# Altium PCB QCopterRCs_Pcb.PcbDoc
Units mil, origin at the board's own origin, x right, y up, seen from the top; angles counter-clockwise.
Board outline 5539.33 x 3011.35 mil, 2 copper layers (Top Layer, Bottom Layer), stack 62.205 mil thick; 50 components, 51 nets, 248 pads, 81 vias.
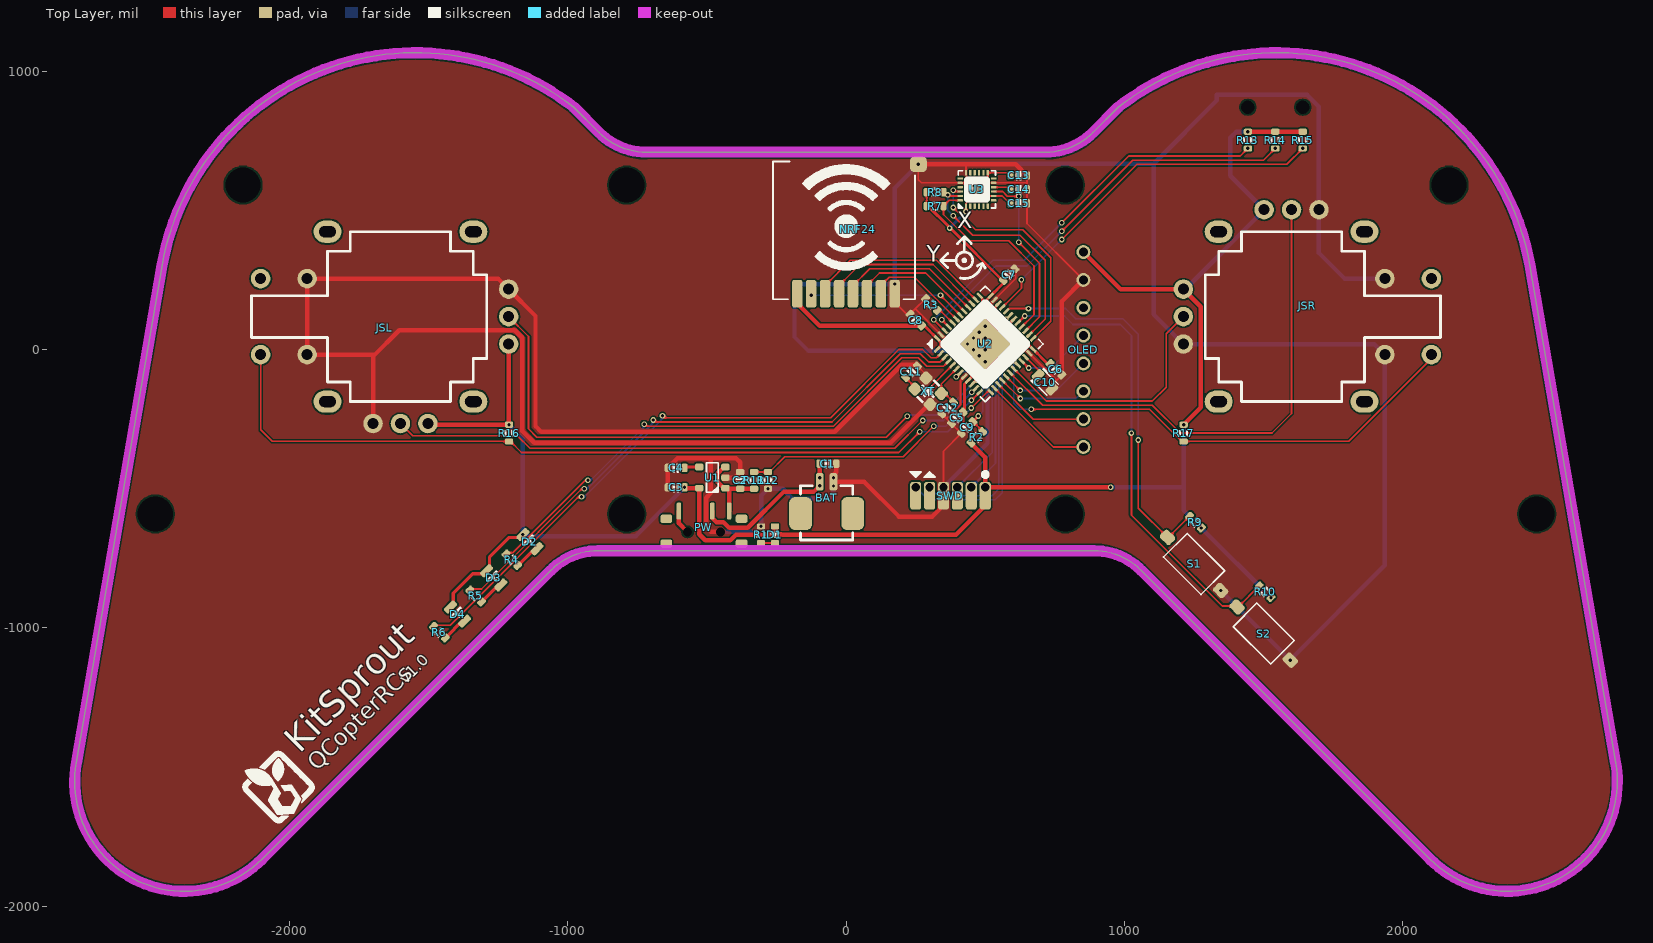
[diagram p0: Top Layer view]
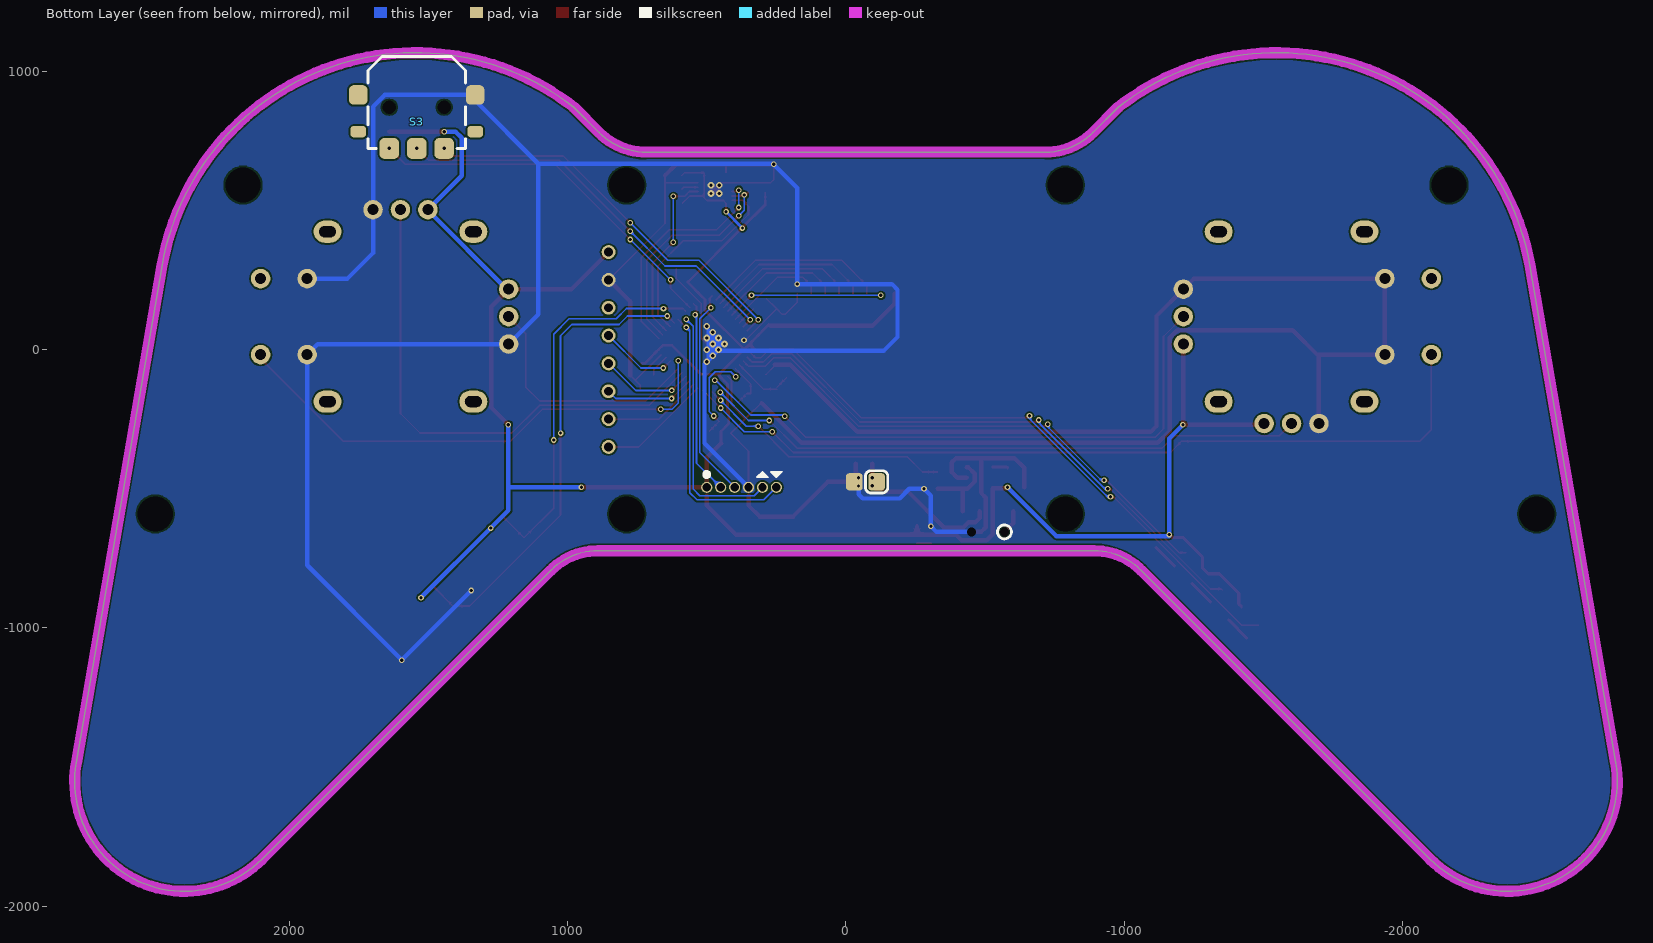
[diagram p1: Bottom Layer view, seen from below]
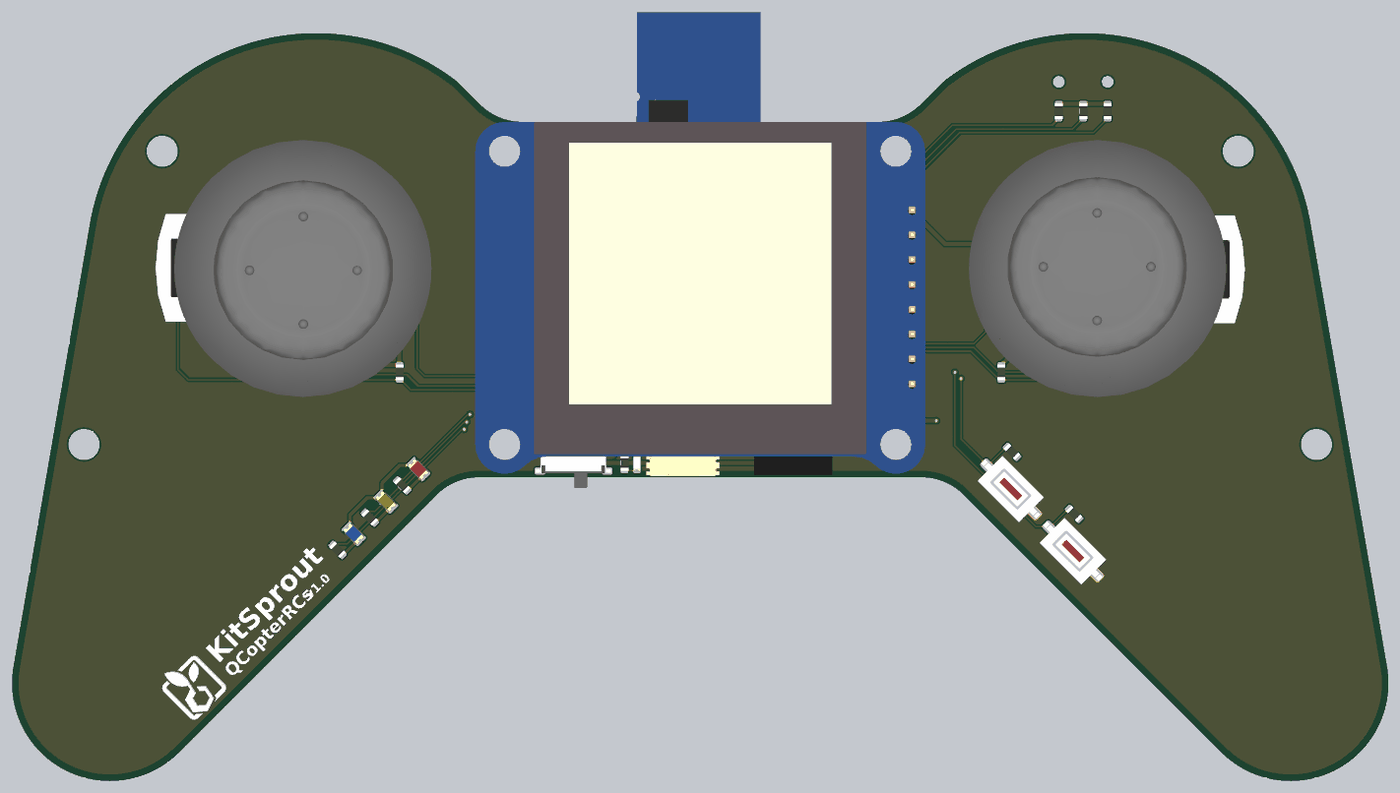
[diagram p2: 3D render of the assembled board from above, using the file's embedded part models]

## Layer stack, top to bottom
Top Solder: solder mask 0.3937, Solder Resist, Dk 3.5
Top Layer: signal copper 1.5748
Dielectric 1: core 59.0551, Dk 4.2
Bottom Layer: signal copper 1.5748
Bottom Solder: solder mask 0.3937, Solder Resist, Dk 3.5

## Board outline
-2763.7,-1483.52 ccw(c-2375.98,-1551.89) -2097.6,-1830.28 -1060.47,-793.15 cw(c-889.76,-963.86) -889.76,-722.44 889.76,-722.44 cw(c889.76,-963.86) 1060.47,-793.15 2097.6,-1830.28 ccw(c2375.98,-1551.89) 2763.7,-1483.52 2455.65,302.73 ccw(c1546.18,142.37) 977.62,870.1 886.89,779.37 cw(c716.18,950.08) 716.18,708.66 -716.18,708.66 cw(c-716.18,950.08) -886.89,779.37 -977.62,870.1 ccw(c-1546.18,142.37) -2455.65,302.73

## Design rules (kind name [scope] priority, off if disabled: settings)
BoardOutlineClearance [All] p1: gap=10 ignorepadtopadclearanceinfootprint=FALSE except(0: Arc-SplitContinuation Track-SplitContinuation SMDPad-SplitContinuation THPad-SplitContinuation Via-SplitContinuation Fill-SplitContinuation Poly-SplitContinuation Region-SplitContinuation Text-SplitContinuation)
Clearance ClearancePolygon [InPolygon] p1: gap=6 ignorepadtopadclearanceinfootprint=FALSE except(0: Arc-Hole Track-Hole SMDPad-Hole THPad-Hole Via-Hole Fill-Hole Poly-Hole Region-Hole Text-Hole)
Clearance [All] p2: gap=6 ignorepadtopadclearanceinfootprint=FALSE except(0: Arc-Hole Track-Hole SMDPad-Hole THPad-Hole Via-Hole Fill-Hole Poly-Hole Region-Hole Text-Hole)
ComponentClearance [All] p1: gap=0 collisioncheckmode=3 verticalgap=0 showdistances=FALSE
Height [All] p1: minheight=0 maxheight=5000 prefheight=500
HoleSize [All] p1: absolutevalues=TRUE maxlimit=200 minlimit=1 maxpercent=80.000 minpercent=20.000
HoleToHoleClearance [All] p1: gap=0 allowstackedmicrovias=TRUE
MinimumAnnularRing [All] p1: minimumring=4
MinimumSolderMaskSliver [All] p1: minsoldermaskwidth=0
PolygonConnect [All] p1: connectstyle=Direct reliefconductorwidth=10 reliefentries=4 polygonreliefangle="90 Angle" airgapwidth=10
RoutingVias [All] p1: holewidth=12 width=24 viastyle="Through Hole" minholewidth=12 minwidth=20 maxholewidth=28 maxwidth=50
SMDEntry [All] p1: side=TRUE corner=TRUE anyangle=TRUE
SilkToSilkClearance [All] p1: silktosilkclearance=0
SilkToSolderMaskClearance [IsPad] p1: minsilkscreentomaskgap=0 clearancetoexposedcopper=TRUE
SolderMaskExpansion [All] p1: expansion=2
Width [All] p1: maxlimit=100 minlimit=6 preferedwidth=10
23 further rules are at their usual default settings.

## Components (designator, comment, footprint, x,y, rotation, side; value= is the part's Value field where it differs from the comment)
BAT "MX1.25_2P" MX1.25_S90_2P -69.61,-589 r0 top
C1 "Cap_0603" CAP_0603 -65,-410 r180 top value=1u
C2 "Cap_0603" CAP_0603 -380,-470 r270 top value=0.1u
C3 "Cap_0603" CAP_0603 -610,-495 r0 top value=0.1u
C4 "Cap_0603" CAP_0603 -610,-425 r0 top value=22n
C5 "Cap_0603" CAP_0603 400,-245 r45 top value=0.1u
C6 "Cap_0603" CAP_0603 753.94,-70.82 r135 top value=0.1u
C7 "Cap_0603" CAP_0603 585.82,268.94 r225 top value=0.1u
C8 "Cap_0603" CAP_0603 251.06,105.82 r315 top value=0.1u
C9 "Cap_0603" CAP_0603 435,-280 r45 top value=0.1u
C10 "Cap_Tan_0805" CAP_TAN_P0805 714.63,-117.2 r315 top value=2.2u
C11 "Cap_0603" CAP_0603 235,-80 r225 top value=10p
C12 "Cap_0603" CAP_0603 365,-210 r45 top value=10p
C13 "Cap_0603" CAP_0603 620,625 r0 top value=10n
C14 "Cap_0603" CAP_0603 620,575 r0 top value=0.1u
C15 "Cap_0603" CAP_0603 620,525 r180 top value=0.1u
D1 "LED_0603" LED_0603_YELLOW -255,-665 r270 top
D2 "LED_0805" LED_0805_RED -1135,-690 r315 top
D3 "LED_0805" LED_0805_GREEN -1265,-820 r315 top
D4 "LED_0805" LED_0805_BLUE -1395,-950 r315 top
JSL "JoyStick" JoyStick -1600,118.11 r0 top locked
JSR "JoyStick" JoyStick 1600,118.11 r180 top locked
NRF24 "nRF24L01P_PA_LNA" NRF24L01P_PA_LNA 175,200 r90 top locked
OLED "OLED_1.5_128*128" OLED_1.5_128x128 0,0 r0 top
PW "SwitchSPDT_2.8x6.6_90" SwitchSPDT_2.8X6.6_90 -510,-655 r0 top locked
R1 "Res_0603" RES_0603 -305,-665 r270 top value=1K
R2 "Res_0603" RES_0603 470,-315 r225 top value=10K
R3 "Res_0603" RES_0603 306.74,161.5 r135 top value=10K
R4 "Res_0603" RES_0603 -1200,-755 r315 top value=680R
R5 "Res_0603" RES_0603 -1330,-885 r315 top value=680R
R6 "Res_0603" RES_0603 -1460,-1015 r315 top value=680R
R7 "Res_0603" RES_0603 320,515 r180 top value=4.7K
R8 "Res_0603" RES_0603 320,565 r180 top value=4.7K
R9 "Res_0603" RES_0603 1255,-620 r315 top value=10K
R10 "Res_0603" RES_0603 1505,-870 r315 top value=10K
R11 "Res_0603" RES_0603 -330,-470 r270 top value=4.7K
R12 "Res_0603" RES_0603 -280,-470 r90 top value=4.7K
R13 "Res_0603" RES_0603 1443.15,752.13 r90 top value=10K
R14 "Res_0603" RES_0603 1541.57,752.13 r90 top value=10K
R15 "Res_0603" RES_0603 1640,752.13 r90 top value=10K
R16 "Res_0603" RES_0603 -1210,-300 r90 top value=10K
R17 "Res_0603" RES_0603 1212.28,-300 r90 top value=10K
S1 "ButtonTACT_3x6x2.5_180" ButtonTACT_3x6x2.5_180 1250,-770 r135 top locked
S2 "ButtonTACT_3x6x2.5_180" ButtonTACT_3x6x2.5_180 1500,-1020 r135 top locked
S3 "ButtonPushLever_11*12_90" ButtonPushLever_11*12_90 1541.57,862.13 r180 bottom locked
SWD "HDR1x6_1.27" HDR1X6_1.27_180HF 500,-525 r270 top
U1 "RT9193" SOT23-5 -480,-460 r180 top
U2 "STM32F411C" QFN_P0.5_48 500,20 r45 top locked
U3 "MPU6500" QFN_P0.4_24 470,575 r90 top
XT "XTAL_2520_4P" XT_2520_4 295,-150 r135 top value=16MHz

## Footprints (in the part's own frame and the unit in brackets; to place one, negate y for a bottom-side part, rotate by r counter-clockwise, add the part's x,y. Pads: shape width x height; smd on the part's side, far side on the other; paste and mask are expansions set on the pad)
ButtonPushLever_11*12_90 [mil]
  rrect50% 55x40 smd: 0(-210,-80) 0(210,-80)
  round 0 hole 48 unplated mask+0: 0(-98.43,7.87)
  round 40 hole 48 unplated mask+0: 0(98.43,7.87)
  rrect50% 70x75 smd: 1(-98.43,-140) 2(0,-140) 3(98.43,-140)
  rrect50% 66x70 smd: 4(210,52) 5(-210,52)
  silkscreen extent -175,-140 175,190
ButtonTACT_3x6x2.5_180 [mil]
  rrect50% 50x40 smd: 1(-135,0) 2(135,0)
  silkscreen extent -95,-60 95,60, body extent -157,-71 157,71, height 94
CAP_0603 [mil]
  rrect50% 22x30 smd: 1(-30,0) 2(30,0)
  silkscreen extent -10,-15 10,15, body extent -31,-16 31,16, height 31
CAP_TAN_P0805 [mil]
  rrect50% 30x44 smd: 1(-35,0) 2(35,0)
  silkscreen extent -40,-34 40,34, body extent -40,-27 40,27, height 59
HDR1X6_1.27_180HF [mil]
  rrect50% 100x40 smd: 1(0,0) 2(0,-50) 3(0,-100) 4(0,-150) 5(0,-200) 6(0,-250)
  body extent -38,-283 190,33, height 71
JoyStick [mil]
  oval 100x80 hole 40 slot 60 at 0 deg: 0(-261.81,-305.12) 0(-261.81,305.12) 0(261.81,-305.12) 0(261.81,305.12)
  round 70 hole 39.37: 1(-98.43,-383.86) 2(0,-383.86) 3(98.43,-383.86) 4(388.86,-98.43) 5(388.86,0) 6(388.86,98.43) 7(-501.97,136.57) 8(-334.8,136.57) 9(-501.97,-136.57) 10(-334.8,-136.57)
  silkscreen extent -535,-305 310,305, body extent -592,-518 518,518, height 1126
LED_0603_YELLOW [mil]
  rrect50% 22x30 smd: 1(-30,0) 2(30,0)
  silkscreen extent -10,-16 10,16, body extent -32,-16 32,16, height 24
LED_0805_BLUE [mil]
  rrect50% 24x50 smd: 1(-36,0) 2(36,0)
  silkscreen extent -11,-24 12,24, body extent -40,-25 40,25, height 43
LED_0805_GREEN [mil]
  rrect50% 24x50 smd: 1(-36,0) 2(36,0)
  silkscreen extent -11,-24 12,24, body extent -40,-25 40,25, height 43
LED_0805_RED [mil]
  rrect50% 24x50 smd: 1(-36,0) 2(36,0)
  silkscreen extent -11,-24 12,24, body extent -40,-25 40,25, height 43
MX1.25_S90_2P [mil]
  rrect50% 82x118 smd: 0(-93.58,0) 0(93.58,0)
  rrect50% 28x62 smd: 1(-24.61,114) 2(24.61,114)
  silkscreen extent -94,-95 94,100, body extent -147,-129 147,135, height 98
NRF24L01P_PA_LNA [mil]
  rrect50% 100x38 smd: 1(0,350) 2(0,300) 3(0,250) 4(0,200) 5(0,150) 6(0,100) 7(0,50) 8(0,0)
  rrect50% 55x60 smd: 8(465,-85)
  silkscreen extent -20,-73 475,437, body extent -15,-68 950,432, height 46
OLED_1.5_128x128 [mil]
  round 50 hole 32: 1(852.4,350) 2(852.4,250) 3(852.4,150) 4(852.4,50) 5(852.4,-50) 6(852.4,-150) 7(852.4,-250) 8(852.4,-350)
  body extent -906,-709 906,709, height 335
QFN_P0.4_24 [mil]
  rrect50% 20x8 smd: 1(-60,39.37) 2(-60,23.62) 3(-60,7.87) 4(-60,-7.87) 5(-60,-23.62) 6(-60,-39.37) 13(60,-39.37) 14(60,-23.62) 15(60,-7.87) 16(60,7.87) 17(60,23.62) 18(60,39.37)
  rrect50% 8x20 smd: 7(-39.37,-60) 8(-23.62,-60) 9(-7.87,-60) 10(7.87,-60) 11(23.62,-60) 12(39.37,-60) 19(39.37,60) 20(23.62,60) 21(7.87,60) 22(-7.87,60) 23(-23.62,60) 24(-39.37,60)
  rrect20% 32x32 smd: 25(0,0)
  silkscreen extent -67,-67 67,67, body extent -60,-60 60,60, height 39
QFN_P0.5_48 [mil]
  rrect50% 28x10 smd: 1(-136,108.27) 2(-136,88.58) 3(-136,68.9) 4(-136,49.21) 5(-136,29.53) 6(-136,9.84) 7(-136,-9.84) 8(-136,-29.53) 9(-136,-49.21) 10(-136,-68.9) 11(-136,-88.58) 12(-136,-108.27) 25(136,-108.27) 26(136,-88.58) 27(136,-68.9) 28(136,-49.21) 29(136,-29.53) 30(136,-9.84) 31(136,9.84) 32(136,29.53) 33(136,49.21) 34(136,68.9) 35(136,88.58) 36(136,108.27)
  rrect50% 10x28 smd: 13(-108.27,-136) 14(-88.58,-136) 15(-68.9,-136) 16(-49.21,-136) 17(-29.53,-136) 18(-9.84,-136) 19(9.84,-136) 20(29.53,-136) 21(49.21,-136) 22(68.9,-136) 23(88.58,-136) 24(108.27,-136) 37(108.27,136) 38(88.58,136) 39(68.9,136) 40(49.21,136) 41(29.53,136) 42(9.84,136) 43(-9.84,136) 44(-29.53,136) 45(-49.21,136) 46(-68.9,136) 47(-88.58,136) 48(-108.27,136)
  rrect10% 132x132 smd: 49(0,0)
  silkscreen extent -147,-147 147,147, body extent -139,-139 139,139, height 22
RES_0603 [mil]
  rrect50% 22x30 smd: 1(-30,0) 2(30,0)
  silkscreen extent -10,-16 10,15, body extent -31,-16 31,16, height 18
SOT23-5 [mil]
  rrect50% 30x24 smd: 1(-47,38) 2(-47,0) 3(-47,-38) 4(47,-38) 5(47,38)
  silkscreen extent -21,-53 21,53, body extent -55,-57 55,57, height 57
SwitchSPDT_2.8X6.6_90 [mil]
  rrect50% 42x30 smd: 0(-135,-42) 0(-135,47) 0(135,-42) 0(135,47)
  round 10 hole 32: 0(-59.06,0) 0(59.06,0)
  rrect50% 16x60 smd: 1(90,75) 2(30,75) 3(-90,75)
  body extent -152,-111 151,86, height 55
XT_2520_4 [mil]
  rrect50% 40x40 smd: 1(39,28) 2(-39,28) 3(-39,-28) 4(39,-28)
  silkscreen extent -30,-45 30,45, body extent -49,-39 49,39, height 31

## Part data
BAT: "MX"
C1 C2 C3 C4 C5 C6 C7 C8 C9 C10 C11 C12 C13 C14 C15: "Capacitor"
D1 D2 D3 D4: "LED"
NRF24 OLED: "Module"
PW: "Switch"
R1 R2 R3 R4 R5 R6 R7 R8 R9 R10 R11 R12 R13 R14 R15 R16 R17: "Resistor"
S1 S2 S3: "Button"
SWD: "Header"
U1: "Power"
U2: library part STM32F4x1C, "MCU"
U3: library part MPU925x, "Sensor Motion"
XT: "Crystal Oscillator"

## Free pads (board coordinates)
  round 114.17 hole 126 unplated paste+0 mask+0: 0(-2480.32,-590.55) 0(-2165.35,590.55) 0(-787.4,-590.55) 0(-787.4,590.55) 0(787.4,-590.55) 0(787.4,590.55) 0(2165.35,590.55) 0(2480.32,-590.55)
  round 40 hole 30: 0(250,-495) 0(300,-495) 0(350,-495) 0(400,-495) 0(450,-495) 0(500,-495)
  rrect40% 60x62 smd far side: 2(-110,-475) 2(-30,-475)

## Via types
v1: diameter 20, hole 12, Top Layer to Bottom Layer, tented both sides, 67 vias
v2: diameter 24, hole 12, Top Layer to Bottom Layer, tented both sides, 14 vias

## Nets (pads, with @x,y where several pads share a name; then routed paths per layer and width w, separated by ;. In a path a pad name is that pad's centre, name@x,y a point inside that pad or via, vN(x,y) a via of type N, cw(c..) or ccw(c..) an arc to the next point about the centre after c; other vN are vias at no path point)
3V3: C3.2 C5.2 C6.2 C7.2 C8.2 C13.1 C15.2 D1.1 D2.1 D3.1 D4.1 JSL.3 JSL.4 JSR.3 JSR.4 NRF24.1 OLED.1 pad.0@500,-495 R2.2 R7.2 R8.2 R9.2 R10.2 R13.2 R14.2 R15.2 R16.2 R17.2 SWD.1 U1.5 U2.1 U2.9 U2.24 U2.36 U2.48 U3.1 U3.8 U3.13 | length 9646
  Top Layer w6: R7.2@290,520 R8.2 ; v1@430.63,499.37 U3.1 430.63,525.63 440,535 500,535 509.37,544.37 509.37,551.38 ; C15.2@587.52,525 561.15,551.38 U3.8 509.37,551.38 ; C13.1 580,635 U3.13 509.37,551.38
  Top Layer w10: C8.2@277.28,89.61 U2.48 346.89,20 ; R7.2@290,520 372.81,437.19 C7.2@565.94,244.06 ; U2.1 346.89,20 ; C5.2 421.21,-266.21 448.79,-293.79 R2.2 ; C5.2@425.32,-223.79 425.32,-124.28 U2.9 460.71,-88.88 ; C7.2@569.61,242.72 U2.36 506,179.11 506,141 366.44,1.44 365.44,1.44 ; C6.2 722.72,-49.61 U2.24 658.11,15 625,15 521.12,-88.88 460.71,-88.88 ; 346.89,20 365.44,1.44 ; 365.44,1.44 455.77,-88.88 460.71,-88.88
  Top Layer w12: D4.1 -1410,-914.09 -1410,-875 -1340,-805 -1300.91,-805 D3.1 -1280,-784.09 -1280,-745 -1210,-675 -1170.91,-675 v1(-1160.46,-664.54)
  Top Layer w16: JSL.3@-1500.43,-270 v1(-1210,-270) ; R16.2@-1211.14,-265.75 JSL.4 ; C3.2@-580,-498 U1.5 -527,-663 -505,-685 -415,-685 -395,-665 -255,-665 ; D1.1 -255,-665 ; NRF24.1 -175,165 -94.61,84.61 C8.2 ; R2.2 500,-387.43 500,-495 v1(950,-495) ; SWD.1 500,-560 395,-665 -255,-665 ; OLED.1 985.87,216.54 JSR.4 1274.19,153.49 1274.19,-208.09 v1(1212.28,-270) ; v1(1443.15,782.13) R15.2
  Bottom Layer w10: v1@372.81,437.19 v1(430.63,495)
  Bottom Layer w16: v1(-1210,-270) -1160.46,-319.54 v1(-1160.46,-664.54) ; v1@-1160.55,-670.55 -755.55,-670.55 v1(-580,-495) ; v1(950,-495) 1212.28,-495 ; JSR.4 1217.86,216.54 JSR.3@1502.44,501.11 ; v1(1212.28,-270) 1212.28,-495 ; v1(1443.15,782.13) 1402.13,782.13 1380,760 1380,623.54 JSR.3 ; v1@1525,-890 v1(1276.21,-641.21) 1212.28,-577.28 1212.28,-495
  other v1: 1526.21,-891.21 371.81,436.19
AD_BAT: R11.1 R12.2 U2.12 | length 922.3
  Top Layer w6: R11.1 R12.2 -275,-440 -220,-385 205,-385 v1@310,-280 ; v1(450.39,-182.72) U2.12
  Bottom Layer w6: v1(315,-275) 358.11,-275 v1(450.39,-182.72)
AD_JSL1: JSL.5 U2.10 | length 2160.7
  Top Layer w6: JSL.5 -1140,46.97 -1140,-285 -1110,-315 145,-315 v1(220,-240) ; U2.10 467.55,-109.88 v1(471.55,-109.88)
  Bottom Layer w6: v1@220,-235 342.44,-235 v1@467.55,-109.88
AD_JSL2: JSL.2 U2.11 | length 2171.8
  Top Layer w6: JSL.2 -1556,-309.75 -1180.25,-309.75 -1135,-355 175,-355 v1(275,-255)
  Bottom Layer w6: v1(275,-255) 350.27,-255 v1(451.47,-153.8)
AD_JSR1: JSR.5 U2.19 | length 894
  Top Layer w6: U2.19 718.92,-185 1100,-185 1150,-135 1150,56.97 JSR.5
AD_JSR2: JSR.2 U2.18 | length 1861.6
  Top Layer w6: U2.18 706.08,-200 1100,-200 1200,-300 1530,-300 1600,-230 JSR.2
BOOT: R3.1 U2.44 | length 70.7
  Top Layer w6: R3.1@332.95,145.29 U2.44
GND: BAT.2 C1.1 C2.1 C3.1 C4.1 C5.1 C6.1 C7.1 C8.1 C9.1 C10.2 C11.1 C12.1 C13.2 C14.2 C15.1 JSL.1 JSL.6 JSL.8 JSL.10 JSR.1 JSR.6 JSR.8 JSR.10 NRF24.8 OLED.2 pad.0@350,-495 pad.2@-30,-475 PW.0@-450.94,-655 R1.1 R3.2 R12.1 S1.1 S2.1 S3.4 SWD.4 U1.2 U2.8 U2.23 U2.35 U2.47 U2.49 U3.11 U3.18 U3.20 U3.25 XT.2 XT.4 | length 18618.1
  Top Layer w6: NRF24.8@175,200 175,170 217.96,127.04 C8.1 248.77,145.96 ; C11.1 XT.4@287.22,-89.8 ; v1(260,665) 260,610 271.38,598.62 U3.20 446.38,598.62 v2(455,590) ; R3.2 248.77,145.96 ; XT.2@309.95,-197.38 C12.1 361.29,-248.71 ; pad.0@350,-495 350,-365 C9.1 C5.1 361.29,-248.71 ; v1(366.2,33.53) 361.2,33.53 U2.47 248.77,145.96 ; U2.8 411.32,-110.44 411.32,-198.68 361.29,-248.71 ; U3.18 430.63,665 ; U2.49 520,40 520,165.27 U2.35 610,255.28 C7.1@610,290.15 ; U3.11 530,599 650,599 ; C13.2 650,599 ; U2.23@663.8,-18.53 756.23,-110.96 ; C10.2 739.38,-127.8 756.23,-110.96 ; C6.1 756.23,-110.96 ; OLED.2 650,452.4 C15.1 C14.2 650,599
  Top Layer w16: JSL.1 -1698.43,-25 ; C3.1 C4.1 -605,-390 -485,-390 ; PW.0@-450.94,-655 -485,-655 -502,-638 -502,-532 -485,-515 -485,-390 ; U1.2 -400,-460 C2.1 -380,-405 -395,-390 -485,-390 ; BAT.2 v1(-45,-460) -45,-450 -35,-440 C1.1 ; BAT.2@-35,-475 65,-475 190,-600 310,-600 350,-560 SWD.4 ; C11.1@256.21,-55 200,-55 -40,-295 -1095,-295 -1115,-275 -1115,120.39 JSL.6 -1249.29,254.68 JSL.8 JSL.10 -1698.43,-18.46 -1698.43,-25 ; v1(260,665) 430.63,665 610,665 C13.2 ; XT.2@302.78,-192.38 160.15,-335 -1120,-335 -1162.14,-292.86 -1162.14,42.14 -1189.11,69.11 -1604.32,69.11 -1698.43,-25 ; C6.1 775.15,172.75 OLED.2
  Bottom Layer w16: PW.0@-450.94,-655 -325,-655 v1(-305,-635) -305,-525 v1(-280,-500) -227.5,-500 -192.5,-535 -60,-535 -45,-520 v1(-45,-490) pad.2@-45,-475 ; pad.0@350,-495 508.05,-336.95 508.05,-51.68 v2(500,-43.64) v2(478.79,-22.43) 461.36,-5 -135,-5 -185,45 -185,215 -165,235 v1(175,235) 175,580 v1(260,665) 262.55,667.55 1105,667.55 ; v1(1345.46,-865.46) 1595,-1115 1934.8,-775.2 JSR.8 1896.65,19.68 JSR.6 1105,125.83 1105,667.55 ; JSR.10 1790.32,254.68 1698.43,346.57 JSR.1 1698.43,871.57 1655.87,914.13 S3.4 1331.57,894.13 1105,667.55
  other v1: 1595.46,-1115.46
  other v2: 457.57,-1.21 500,-1.21 436.36,20 478.79,20 457.57,41.21 500,41.21 478.79,62.43 500,83.64 455,560 485,560 485,590
KEY_JSL: JSL.9 R16.1 U2.13 | length 3011.5
  Top Layer w6: JSL.9 -2101.97,-288.03 -2060,-330 R16.1 -1205,-330 -1165,-370 190,-370 v1(265,-295) ; v1(450,-210) U2.13@513.44,-146.56
  Bottom Layer w6: v1(265,-295) 365,-295 v1(450,-210)
KEY_JSR: JSR.7 R17.1 U2.20 | length 1846.4
  Top Layer w6: v1(665,-215) 1090,-215 1205,-330 R17.1 1805,-330 2101.97,-33.03 JSR.7
  Bottom Layer w6: v1(602.05,-40.29) 602.05,-192.05 625,-215 v1(665,-215)
KEY_S1: R9.1 S1.2 U2.32 | length 1399.4
  Top Layer w6: U2.32 585.29,147.05 v1(655.29,147.05) ; v1(1050,-325) 1050,-570 S1.2 ; S1.2@1156.29,-676.29 R9.1
  Bottom Layer w6: v1(655.29,147.05) 787.95,147.05 825,110 995,110 1050,55 v1(1050,-325)
KEY_S2: R10.1 S2.2 U2.29 | length 1715.9
  Top Layer w6: U2.29 v1(642.05,120.29) ; v1(1025,-300) 1025,-595 1351.21,-921.21 S2.2@1403.79,-921.21 ; S2.2@1406.29,-926.29 R10.1
  Bottom Layer w6: v1(642.05,120.29) 784.71,120.29 815,90 985,90 1025,50 v1(1025,-300)
KEY_SL: R13.1 S3.3 U2.46 | length 1439.2
  Top Layer w6: v1(315.12,107.45) U2.46 ; v1(775,455) 1015,695 1416.02,695 v1(1443.15,722.13)
  Bottom Layer w6: v1(315.12,107.45) 527.67,320 640,320 v1(775,455)
KEY_SP: R14.1 S3.2 U2.45 | length 1488
  Top Layer w6: v1(344.03,106.37) U2.45 ; v1(775,425) 1030,680 1499.45,680 v1(1541.57,722.13)
  Bottom Layer w6: v1(344.03,106.37) 537.67,300 650,300 v1(775,425)
KEY_SR: R15.1 S3.1 U2.33 | length 1333
  Top Layer w6: U2.33 630,219.6 v1(630,250) ; v1(775,395) 1045,665 1582.87,665 v1(1640,722.13)
  Bottom Layer w6: v1(630,250) v1(775,395)
LED_B: R6.1 U2.2 | length 2247.4
  Top Layer w6: R6.1@-1481.21,-990 -1421.41,-990 v1@-955.2,-523.8 ; v1@-655,-245 -55,-245 190,0 275,0 305,-30 324.72,-30 U2.2
  Bottom Layer w6: v1@-944.7,-534.3 v1@-653.85,-243.44
  other v1: -949.7,-529.3 -658.9,-238.39
LED_G: R5.1 U2.3 | length 2075.6
  Top Layer w6: R5.1 -1347.43,-860 -1309,-860 -1104,-655 -1104,-654.76 v1@-944.62,-495.38 ; v1@-690,-260 -50,-260 195,-15 266.97,-15 296.97,-45 337.56,-45 U2.3
  Bottom Layer w6: v1@-934.69,-505.31 v1@-687.19,-257.81
  other v1: -939.62,-500.38 -692,-253
LED_R: R4.1 U2.4 | length 1898.4
  Top Layer w6: R4.1@-1221.21,-730 -1196.21,-730 v1@-930.61,-464.39 ; v1@-725,-275 -45,-275 200,-30 260,-30 290,-60 350.4,-60 U2.4
  Bottom Layer w6: v1@-921.11,-473.89 v1@-721.61,-274.39
  other v1: -926.61,-469.39 -725,-268
M_CSM: U2.25 U3.22 | length 829.9
  Top Layer w6: v1(385,510) 465,430 635,430 735,330 735,101.89 U2.25 ; v1(385,572.13) 390,567.13 U3.22
  Bottom Layer w6: v1(385,510) v1(385,572.13)
M_INTM: U3.12
M_SCK: R8.1 U2.26 U3.23 | length 834.9
  Top Layer w6: R8.1 363.62,551.38 U3.23 ; v1(385,480) 455,410 625,410 715,320 715,109.73 U2.26
  Bottom Layer w6: v1(365,555) 365,500 v1(385,480)
M_SDI: R7.1 U2.28 U3.24 | length 737
  Top Layer w6: U3.24 370.63,535.63 R7.1 350,485 445,390 585,390 675,300 675,125.4 U2.28
M_SDO: U2.27 U3.9 | length 631.5
  Top Layer w6: U3.9 562.37,567.13 579.49,550 v1(620,550) ; v1(620,385) 695,310 695,117.56 U2.27
  Bottom Layer w6: v1(620,385) v1(620,550)
NetC4_2: C4.2 U1.4 | length 54.2
  Top Layer w12: C4.2 -577,-422 U1.4
NetD1_2: D1.2 R1.2 | length 50
  Top Layer w6: R1.2 D1.2
NetD2_2: D2.2 R4.2 | length 91.9
  Top Layer w12: R4.2 D2.2@-1113.79,-711.21
NetD3_2: D3.2 R5.2 | length 91.9
  Top Layer w12: R5.2 D3.2@-1243.79,-841.21
NetD4_2: D4.2 R6.2 | length 91.9
  Top Layer w12: R6.2 D4.2@-1373.79,-971.21
NRF_CE: NRF24.2 U2.42 | length 565.3
  Top Layer w6: v1(339.46,194.46) U2.42
  Bottom Layer w6: v1(-125,194.46) v1(339.46,194.46)
NRF_CSN: NRF24.3 U2.38 | length 667.2
  Top Layer w6: NRF24.3 -75,230 15,320 325.27,320 U2.38
NRF_IRQ: NRF24.7 U2.43 | length 376.8
  Top Layer w6: NRF24.7 125,230 155,260 246.08,260 U2.43
NRF_SCK: NRF24.4 U2.39 | length 596.7
  Top Layer w6: NRF24.4 -25,230 50,305 312.44,305 U2.39
NRF_SDI: NRF24.5 U2.40 | length 526.1
  Top Layer w6: NRF24.5 25,230 85,290 299.6,290 U2.40
NRF_SDO: NRF24.6 U2.41 | length 455.5
  Top Layer w6: NRF24.6 75,230 120,275 286.76,275 U2.41
OLED_CS: OLED.8 U2.14 | length 406.4
  Top Layer w6: U2.14 744.72,-350 OLED.8
OLED_DC: OLED.4 U2.21 | length 280
  Top Layer w6: U2.21 v1(655.97,-66.37)
  Bottom Layer w6: v1(655.97,-66.37) 736.03,-66.37 OLED.4
OLED_RES: OLED.6 U2.16 | length 328.7
  Top Layer w6: U2.16 v1(626.37,-175.97)
  Bottom Layer w6: v1(626.37,-175.97) 826.44,-175.97 OLED.6
OLED_SCK: OLED.7 U2.15 | length 356.8
  Top Layer w6: U2.15 672.56,-250 OLED.7
OLED_SDI: OLED.5 U2.17 | length 338
  Top Layer w6: U2.17 v1(625.29,-147.05)
  Bottom Layer w6: v1(625.29,-147.05) 755.36,-147.05 OLED.5
REG: C14.1 U3.10 | length 63.3
  Top Layer w6: U3.10 582.13,582.87 C14.1
RST: C9.2 R2.1 U2.7 | length 354.4
  Top Layer w6: v1(395.79,-98.13) U2.7 ; v1(475,-238.79) 456.21,-257.57 C9.2 R2.1
  Bottom Layer w6: v1(395.79,-98.13) 413.92,-80 470,-80 491.05,-101.05 491.05,-222.74 v1(475,-238.79)
SWCLK: pad.0@400,-495 SWD.3 U2.37 | length 755.4
  Top Layer w6: U2.37 489.45,183.66 v1@489.45,154.45
  Bottom Layer w6: pad.0@400,-495 525.05,-369.95 525.05,109.95 v1(485,150)
SWDIO: pad.0@450,-495 SWD.2 U2.34 | length 700.2
  Top Layer w6: v1@537.05,130 537.05,154.48 U2.34
  Bottom Layer w6: pad.0@450,-495 537.05,-407.95 v1@537.05,130
  other v1: 542.05,125
U_RX: pad.0@300,-495 SWD.5 U2.31 | length 890.9
  Bottom Layer w6: pad.0@300,-495 330,-525 525,-525 549.05,-500.95 549.05,82.96 v1(574.21,108.13)
U_TX: pad.0@250,-495 SWD.6 U2.30 | length 981.1
  Top Layer w6: v1(573.13,79.21) U2.30
  Bottom Layer w6: pad.0@250,-495 295,-540 535,-540 561.05,-513.95 561.05,67.13 v1(573.13,79.21)
VBAT: BAT.1 C1.2 pad.2@-110,-475 PW.2 | length 567
  Top Layer w16: PW.2 -480,-605 -465,-620 -440,-620 -420,-640 -352.58,-640 -222.58,-510 -115,-510 v1(-94.21,-489.21) BAT.1 v1(-94.21,-460) C1.2@-94.21,-410
VCAP: C10.1 U2.22 | length 83.6
  Top Layer w6: U2.22 689.88,-72.45 C10.1
VCHG: PW.0@-569.06,-655 PW.3 | length 87.8
  Top Layer w16: PW.3 -600,-624.06 PW.0@-569.06,-655
VIN: C2.2 PW.1 R11.2 U1.1 U1.3 | length 290
  Top Layer w16: U1.3 -438.28,-422 -462,-445.72 -462,-474.28 -436.28,-500 U1.1@-420,-500 ; PW.1 U1.1@-420,-500 ; R11.2 C2.2 U1.1@-420,-500
XT_I: C11.2 U2.5 XT.1 | length 219.2
  Top Layer w6: C11.2 XT.1@247.62,-135.05 ; XT.1 296.02,-142.22 U2.5
XT_O: C12.2 U2.6 XT.3 | length 167.8
  Top Layer w6: C12.2 355.2,-157.78 XT.3 342.38,-123.7 U2.6
pads on no net: BAT.0 JSL.0 JSL.7 JSR.0 JSR.9 OLED.3 PW.0@-375,-608 PW.0@-375,-697 PW.0@-645,-608 PW.0@-645,-697 S3.0 S3.5 U3.2 U3.3 U3.4 U3.5 U3.6 U3.7 U3.14 U3.15 U3.16 U3.17 U3.19 U3.21

## Polygon pours and split planes (outlines as drawn)
GND on Top Layer "Mechanical 1-No Net" (solid, remove dead copper, pour order 13): -2763.7,-1483.52 ccw(c-2375.98,-1551.89) -2097.6,-1830.28 -1060.47,-793.15 cw(c-889.76,-963.86) -889.76,-722.44 889.76,-722.44 cw(c889.76,-963.86) 1060.47,-793.15 2097.6,-1830.28 ccw(c2375.98,-1551.89) 2763.7,-1483.52 2455.65,302.73 ccw(c1546.18,142.37) 977.62,870.1 886.89,779.37 cw(c716.18,950.08) 716.18,708.66 -716.18,708.66 cw(c-716.18,950.08) -886.89,779.37 -977.62,870.1 ccw(c-1546.18,142.37) -2455.65,302.73
GND on Bottom Layer "GND_L02_P014" (solid, remove dead copper, pour order 14): -2763.7,-1483.52 ccw(c-2375.98,-1551.89) -2097.6,-1830.28 -1060.47,-793.15 cw(c-889.76,-963.86) -889.76,-722.44 889.76,-722.44 cw(c889.76,-963.86) 1060.47,-793.15 2097.6,-1830.28 ccw(c2375.98,-1551.89) 2763.7,-1483.52 2455.65,302.73 ccw(c1546.18,142.37) 977.62,870.1 886.89,779.37 cw(c716.18,950.08) 716.18,708.66 -716.18,708.66 cw(c-716.18,950.08) -886.89,779.37 -977.62,870.1 ccw(c-1546.18,142.37) -2455.65,302.73
no net on Keep-Out Layer "Mechanical 1-No Net" (none): -2763.7,-1483.52 ccw(c-2375.98,-1551.89) -2097.6,-1830.28 -1060.47,-793.15 cw(c-889.76,-963.86) -889.76,-722.44 889.76,-722.44 cw(c889.76,-963.86) 1060.47,-793.15 2097.6,-1830.28 ccw(c2375.98,-1551.89) 2763.7,-1483.52 2455.65,302.73 ccw(c1546.18,142.37) 977.62,870.1 886.89,779.37 cw(c716.18,950.08) 716.18,708.66 -716.18,708.66 cw(c-716.18,950.08) -886.89,779.37 -977.62,870.1 ccw(c-1546.18,142.37) -2455.65,302.73

## Other copper
Top Layer:
  region net GND: 455,590 485,590 485,560 455,560
Bottom Layer:
  region net GND: 500,83.64 500,-43.64 436.36,20

## Silkscreen, mask and mechanical layers (free items; w line width, h text height)
Top Overlay:
  drawing of 3515 lines, arcs and shapes, not listed
  text "X" at 400,415 h100
  text "Y" at 290,295 h100
  text "v1.0" at -1570,-1215 h70 r45
  text "KitSprout" at -1940,-1475 h160 r45
  text "QCopterRCs" at -1885,-1530 h100 r45
Bottom Overlay:
  circle w16: c500,-448.86 r8
  circle w10: c-569.06,-655 r25.02
  region: 250,-458.86 270,-438.86 230,-438.86
  region: 300,-438.86 280,-458.86 320,-458.86
  lines w6: 230,-438.86 270,-438.86 250,-458.86 230,-438.86 ; 280,-458.86 320,-458.86 300,-438.86 280,-458.86
  lines w10: -150,-495 ccw(c-130,-495) -130,-515 -90,-515 ccw(c-90,-495) -70,-495 -70,-455 ccw(c-90,-455) -90,-435 -130,-435 ccw(c-130,-455) -150,-455 -150,-495
Mechanical 1:
  the board outline again, w2
T-Component:
  circle w2: c2165.35,590.55 r118.11
  circle w2: c-2480.32,-590.55 r118.11
  circle w2: c-2165.35,590.55 r118.11
  circle w2: c2480.32,-590.55 r118.11
  circle w2: c787.4,-590.55 r118.11
  circle w2: c787.4,590.55 r118.11
  circle w2: c-787.4,-590.55 r118.11
  circle w2: c-787.4,590.55 r118.11